# Altium PCB Glog 5G_V1.PcbDoc (part 2 of 3)
Units mil, origin at the board's own origin, x right, y up, seen from the top; angles counter-clockwise.
Board outline 2165.35 x 3838.58 mil, 4 copper layers (Top Layer, GND, PWR, Bottom Layer); 183 components, 150 nets, 767 pads, 1532 vias.
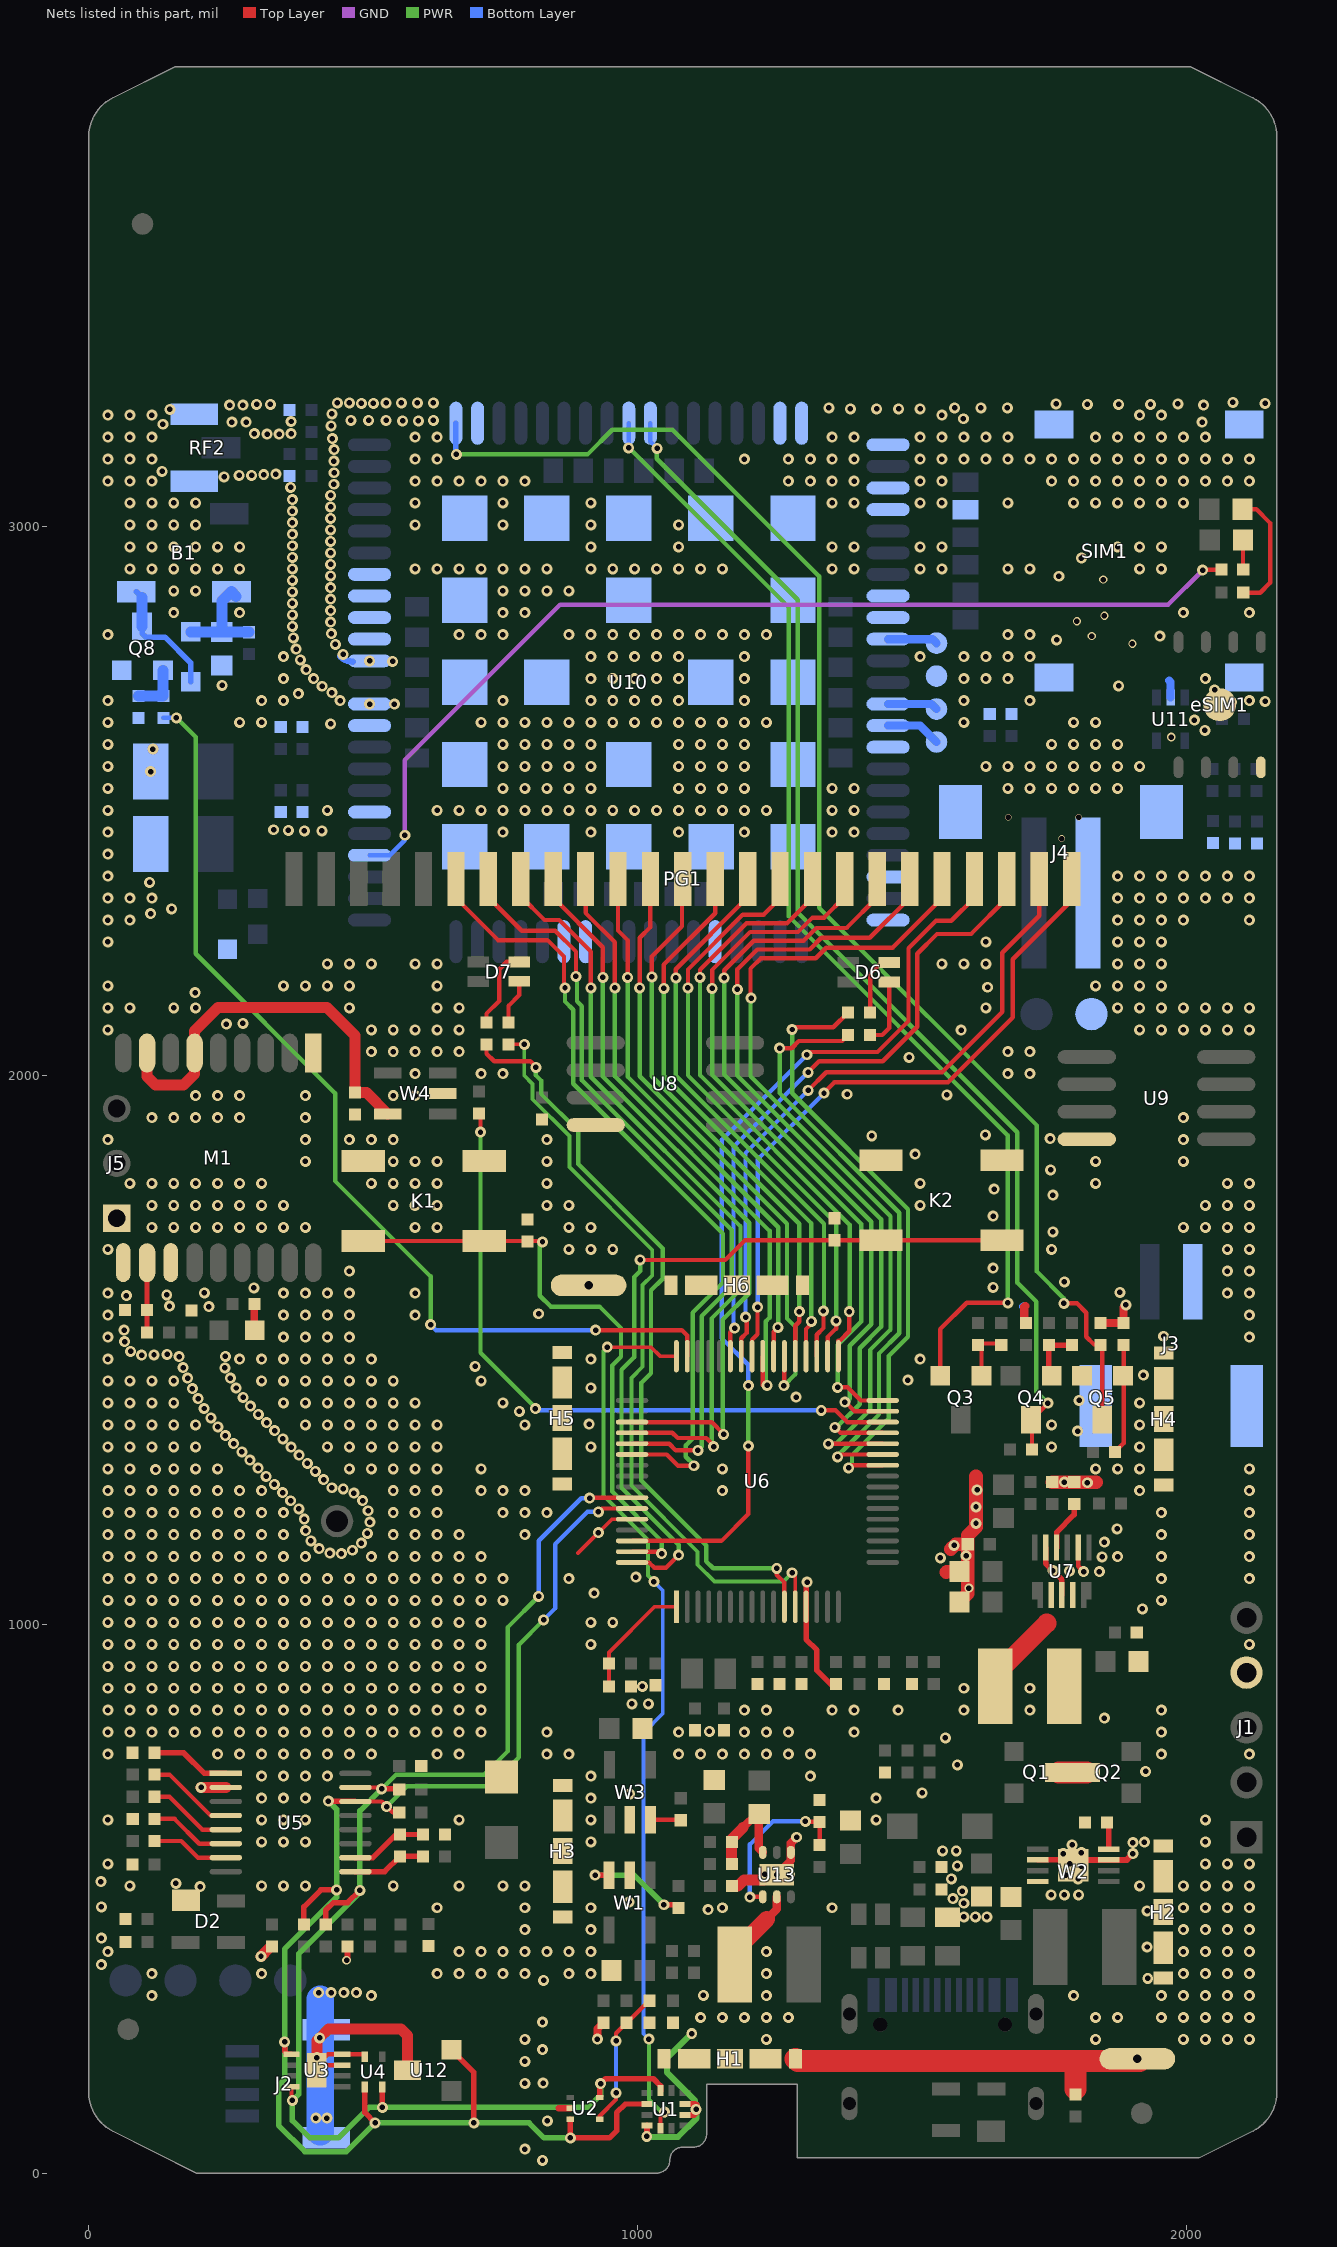
[diagram p4: the nets of this part, all layers, seen from the top]

## Via types
v1: diameter 20, hole 10, Top Layer to Bottom Layer, tented both sides, 1511 vias
v2: diameter 15, hole 10, Top Layer to Bottom Layer, tented both sides, 7 vias
v3: diameter 25, hole 16, Top Layer to Bottom Layer, tented both sides, 5 vias
v4: diameter 16, hole 10, Top Layer to Bottom Layer, tented both sides, 4 vias
v5: diameter 12, hole 10, Top Layer to Bottom Layer, tented both sides, 3 vias
v6: diameter 30, hole 20, Top Layer to Bottom Layer, tented both sides, 1 vias
v7: diameter 20, hole 16, Top Layer to Bottom Layer, tented both sides, 1 vias

## Nets (pads, with @x,y where several pads share a name; then routed paths per layer and width w, separated by ;. In a path a pad name is that pad's centre, name@x,y a point inside that pad or via, vN(x,y) a via of type N, cw(c..) or ccw(c..) an arc to the next point about the centre after c; other vN are vias at no path point) (continued)
GND: C1.2 C2.2 C3.2 C4.2 C5.1 C6.2 C7.2 C8.1 C9.1 C10.1 C11.1 C12.1 C13.2 C14.2 C15.2 C16.2 C17.2 C18.1 C19.2 C20.2 C21.1 C22.2 C23.1 C24.1 C27.1 C28.2 C29.2 C30.2 C31.1 C32.1 C34.2 C36.1 C37.2 C38.2 C39.1 C40.1 C41.2 C42.2 C43.1 C44.1 C45.2 C46.1 C47.2 C48.2 C49.2 C50.1 C51.2 C52.1 C53.1 C54.1 C55.2 C56.2 C57.2 C60.2 C61.2 D2.1 D10.2 eSIM1.0 eSIM1.C5 H1.1 H2.1 H3.1 H4.1 H5.1 H6.1 J1.4 J2.5 J2.6 J3.1 J4.1 J5.1 K1.2 K2.2 L2.2 M1.1 M1.10 M1.12 N1.1 pad.10@1545,2728 pad.10@1827.35,2112.06 Q5.E Q8.E R8.1 R9.1 R14.2 R17.1 R20.1 R21.1 R26.1 R30.1 R37.2 R54.2 R59.1 R61.2 R65.2 RF2.2 SIM1.0 SIM1.C5 U1.4 U1.8 U1.9 U2.2 U3.0 U3.7 U3.8 U4.4 U5.2 U6.13 U6.60 U7.2 U7.5 U7.9 U8.4 U9.4 U10.2 U10.17 U10.18 U10.29 U10.39 U10.45 U10.46 U10.54 U10.58 U10.59 U10.61 U10.62 U10.63 U10.64 U10.65 U10.69 U10.70 U10.71 U10.72 U10.73 U10.74 U10.75 U10.76 U10.77 U10.78 U10.79 U10.80 U10.81 U10.82 U10.83 U10.84 U10.85 U10.86 U10.87 U10.88 U10.89 U10.91 U10.92 U10.94 U11.2 U12.C U13.1 W1.2 W2.0 W2.3 W2.6 W2.8 W3.2 W4.2 | length 3240.1
  Top Layer w7: 892,1130 953.45,1191.45 U6.60@990.29,1191.45
  Top Layer w8: U3.0@415.82,187.01 425.67,196.85 U3.7@462.08,196.85 ; U3.0@423.02,203.54 436.02,216.54 U3.8@462.08,216.54 498.83,216.54 U4.4@503.25,212.12 ; U7.2@1803.15,1139.78 1803.15,1105.85 v1(1813,1096)
  Top Layer w10: v1@1307.22,1077 U6.13@1307.22,1032 1307.22,972.78 1327,953 1327,916 1353,890 C19.2@1363,890 ; W2.6@1729.2,570.75 W2.0@1794.35,570.75 ; U7.5@1744.09,1139.78 1744.09,1110.91 1773.62,1081.38 U7.9@1773.62,1053.17
  Top Layer w11: v4@472,388 R61.2@472,413 ; 855.89,118.11 U2.2@877.95,118.11 ; U1.4@1017.55,86.47 1017.55,66.45 v1@1018,66 ; U1.8@1086.45,106.16 1103.16,106.16 1107.16,110.16 v1@1107.16,124.84 ; U1.9@1086.45,125.84 1105.16,125.84 ; W2.0@1794.35,570.75 W2.3@1859.12,570.75 1891.75,570.75 v1@1904,583
  Top Layer w15: v1(927,244) 927,263 C3.2@938,274 ; v1(1254,544) 1279.59,569.59 U13.1@1279.59,584.49 1279.59,601.59 v1(1290,612) ; 1707,1580 1706,1579 1705,1579 1705,1552 C34.2@1708,1549 ; C36.1@1844,1549 R37.2@1886,1549 1886,1578 v1(1890,1582)
  Top Layer w20: v1@204.27,702.73 U5.2@249.87,702.73 ; v1(314,395) C5.1@330,411 ; U3.0@415.82,187.01 415.82,241.38 v1(421,246.56) 437,262.56 569,262.56 581,250.56 U12.C@581,187.56 ; R65.2@1172,523 1183,523 1194,534 U13.1@1231,534
  Top Layer w25: 1563,1095 1564,1096 C29.2@1586.68,1096 ; v1@1571,1137 1580,1146 C31.1@1602,1146 ; C28.2@1586.68,1041 1602,1056.32 C31.1@1602,1146 ; 1617,1270 1617,1177 1602,1162 C31.1@1602,1146 ; R30.1@1756,1259 C32.1@1796,1259 1836,1259
  Top Layer w40: H1.1@1288.44,208.28 1292.38,204.34 1798,204.34 ; C1.2@1798,153 1798,204.34 ; N1.1@1914.94,204.34 1798,204.34
  PWR w11: v1@1018,66 1074,66 1107.16,99.16 v1@1107.16,124.84 ; v1@1098,254 1054,210 1054,183 1105.16,131.84 v1@1105.16,124.84
  Bottom Layer w12: v1@458.1,2764.14 ccw(c482,2789) U10.61@481.16,2754.53
  Bottom Layer w15: 1703,1579 1705,1579 ; 1969,2720 1971.59,2717.41 U11.2@1971.59,2689
  Bottom Layer w50: J2.6@422,75.52 J2.5@422,260 ; J2.5@422,261.37 422,317
  other v1: 827,23 795,43.5 1017,67 836,95 414,100 434,100 1107.16,116 795,163.5 828,164 795,203.5 416,210.56 827,225 795,243.5 1235,243.5 1835,243.5 1995,243.5 2035,243.5 2075,243.5 2115,243.5 1099,254 827,275 1115,283.5 1155,283.5 1195,283.5 1235,283.5 1275,283.5 1835,283.5 1875,283.5 1955,283.5 1995,283.5 2035,283.5 2075,283.5 2115,283.5 115,323.5 515,323.5 1120,324 1235,323.5 1795,323.5 1955,323.5 1995,323.5 2035,323.5 2075,323.5 2115,323.5 419,329 442,329 465,329 488,329 829,351 1930,355 115,363.5 315,363.5 635,363.5 675,363.5 715,363.5 755,363.5 795,363.5 875,363.5 915,363.5 1235,363.5 1995,363.5 2035,363.5 2075,363.5 2115,363.5 23,380 35,403.5 675,403.5 715,403.5 755,403.5 795,403.5 835,403.5 875,403.5 915,403.5 1235,403.5 1995,403.5 2035,403.5 2075,403.5 2115,403.5 1929,412 23,428 795,443.5 915,443.5 1995,443.5 2035,443.5 2075,443.5 2115,443.5 1595,467 1616,467 1637,467 1929,478 1129,480 635,483.5 795,483.5 915,483.5 1155,483.5 1355,483.5 1995,483.5 2035,483.5 2075,483.5 2115,483.5 23,485 1594.71,491.72 985,494 1575,500 1754,507 1778,507 1804,507 1592,514 203,522 75,523.5 315,523.5 355,523.5 395,523.5 555,523.5 675,523.5 755,523.5 795,523.5 1915,523.5 1995,523.5 2035,523.5 2075,523.5 2115,523.5 159,528 22,531 1572,536 1803,536 1781,543 1277,544 1232,545 1809,559 1583,560 35,563.5 1788,564 2035,563.5 2075,563.5 2115,563.5 1776,582 1903,582 1809,584 1556,587 1581,587 1792,598 1903,602 1924,603 315,603.5 355,603.5 395,603.5 915,603.5 2035,603.5 35,643.5 315,643.5 355,643.5 395,643.5 675,643.5 915,643.5 1435,643.5 2035,643.5 315,683.5 355,683.5 395,683.5 915,683.5 1435,683.5 986,691 1519,693 205,703 315,723.5 355,723.5 395,723.5 435,723.5 915,723.5 1315,723.5 1926,732 1583,744 35,763.5 235,763.5 275,763.5 315,763.5 355,763.5 395,763.5 435,763.5 475,763.5 515,763.5 635,763.5 675,763.5 835,763.5 875,763.5 1075,763.5 1115,763.5 1155,763.5 1195,763.5 1235,763.5 1275,763.5 1315,763.5 1955,763.5 2115,763.5 1561,793 35,803.5 75,803.5 115,803.5 155,803.5 195,803.5 235,803.5 275,803.5 315,803.5 355,803.5 395,803.5 435,803.5 475,803.5 515,803.5 555,803.5 595,803.5 635,803.5 675,803.5 715,803.5 835,803.5 1075,803.5 1195,803.5 1235,803.5 1275,803.5 1395,803.5 1955,803.5 1131,805 1851,829 35,843.5 75,843.5 115,843.5 155,843.5 195,843.5 235,843.5 275,843.5 315,843.5 355,843.5 395,843.5 435,843.5 475,843.5 515,843.5 555,843.5 595,843.5 635,843.5 675,843.5 715,843.5 1195,843.5 1235,843.5 1355,843.5 1395,843.5 1475,843.5 1595,843.5 1715,843.5 1955,843.5 990,855 1020,855 35,883.5 75,883.5 115,883.5 155,883.5 195,883.5 235,883.5 275,883.5 315,883.5 355,883.5 395,883.5 435,883.5 475,883.5 515,883.5 555,883.5 595,883.5 635,883.5 675,883.5 715,883.5 1595,883.5 1715,883.5 1009,887 35,923.5 75,923.5 115,923.5 155,923.5 195,923.5 235,923.5 275,923.5 315,923.5 355,923.5 395,923.5 435,923.5 475,923.5 515,923.5 555,923.5 595,923.5 635,923.5 675,923.5 715,923.5 35,963.5 75,963.5 115,963.5 155,963.5 195,963.5 235,963.5 275,963.5 315,963.5 355,963.5 395,963.5 435,963.5 475,963.5 515,963.5 555,963.5 595,963.5 635,963.5 675,963.5 715,963.5 915,963.5 2115,963.5 35,1003.5 75,1003.5 115,1003.5 155,1003.5 195,1003.5 235,1003.5 275,1003.5 315,1003.5 355,1003.5 395,1003.5 435,1003.5 475,1003.5 515,1003.5 555,1003.5 595,1003.5 635,1003.5 675,1003.5 715,1003.5 915,1003.5 955,1003.5 1920,1028 35,1043.5 75,1043.5 115,1043.5 155,1043.5 195,1043.5 235,1043.5 275,1043.5 315,1043.5 355,1043.5 395,1043.5 435,1043.5 475,1043.5 515,1043.5 555,1043.5 595,1043.5 635,1043.5 675,1043.5 715,1043.5 755,1043.5 1955,1043.5 921,1057 1309.22,1077 35,1083.5 75,1083.5 115,1083.5 155,1083.5 195,1083.5 235,1083.5 275,1083.5 315,1083.5 355,1083.5 395,1083.5 435,1083.5 475,1083.5 515,1083.5 555,1083.5 595,1083.5 635,1083.5 675,1083.5 715,1083.5 755,1083.5 875,1083.5 1955,1083.5 2115,1083.5 997,1086 1842,1096 1787,1097 1757,1098 1552,1121 1847,1123 35,1123.5 75,1123.5 115,1123.5 155,1123.5 195,1123.5 235,1123.5 275,1123.5 315,1123.5 355,1123.5 395,1123.5 515,1123.5 555,1123.5 595,1123.5 635,1123.5 675,1123.5 715,1123.5 1875,1123.5 1955,1123.5 2115,1123.5 1599,1125 460.31,1128.72 439.33,1129.67 480.35,1135 419.97,1137.81 1577,1144 496.97,1147.83 1851,1150 404.7,1152.22 35,1163.5 75,1163.5 115,1163.5 155,1163.5 195,1163.5 235,1163.5 275,1163.5 315,1163.5 355,1163.5 555,1163.5 595,1163.5 635,1163.5 675,1163.5 795,1163.5 1955,1163.5 2115,1163.5 508.06,1165.66 929,1167 395.27,1170.98 1874,1174 1617,1184 512.38,1186.22 392.81,1191.84 35,1203.5 75,1203.5 115,1203.5 155,1203.5 195,1203.5 235,1203.5 275,1203.5 315,1203.5 355,1203.5 555,1203.5 595,1203.5 635,1203.5 755,1203.5 795,1203.5 835,1203.5 1955,1203.5 2115,1203.5 509.4,1207 382.91,1210.36 1617,1214 368.06,1225.21 499.26,1225.4 483.46,1239.22 353.21,1240.06 35,1243.5 75,1243.5 115,1243.5 155,1243.5 195,1243.5 235,1243.5 275,1243.5 315,1243.5 555,1243.5 595,1243.5 635,1243.5 715,1243.5 755,1243.5 795,1243.5 1155,1243.5 1915,1243.5 2115,1243.5 1619,1245 463.88,1246.82 442.99,1248.93 338.36,1254.91 1820,1258 1778,1259 428.11,1263.75 323.51,1269.76 413.26,1278.6 122,1282 35,1283.5 75,1283.5 155,1283.5 195,1283.5 235,1283.5 475,1283.5 515,1283.5 555,1283.5 595,1283.5 635,1283.5 715,1283.5 1155,1283.5 1835,1283.5 1875,1283.5 1915,1283.5 2115,1283.5 308.67,1284.61 398.41,1293.45 293.82,1299.45 383.56,1308.3 278.97,1314.3 35,1323.5 75,1323.5 115,1323.5 155,1323.5 195,1323.5 368.72,1323.15 435,1323.5 475,1323.5 515,1323.5 555,1323.5 595,1323.5 635,1323.5 915,1323.5 1755,1323.5 1915,1323.5 264.12,1329.15 353.87,1338 249.27,1344 1802,1352 339.02,1352.85 235.24,1359.63 35,1363.5 75,1363.5 115,1363.5 155,1363.5 195,1363.5 395,1363.5 435,1363.5 475,1363.5 515,1363.5 555,1363.5 595,1363.5 635,1363.5 795,1363.5 1755,1363.5 1915,1363.5 912,1365 324.17,1367.7 222.54,1376.36 309.32,1382.55 785,1388 210.17,1393.33 294.66,1397.59 35,1403.5 75,1403.5 115,1403.5 155,1403.5 355,1403.5 395,1403.5 435,1403.5 475,1403.5 515,1403.5 555,1403.5 595,1403.5 755,1403.5 1915,1403.5 1805,1408 199.38,1411.34 281.32,1413.8 1289,1414 189.1,1429.65 268.83,1430.69 915,1431 35,1443.5 75,1443.5 115,1443.5 155,1443.5 315,1443.5 355,1443.5 395,1443.5 435,1443.5 475,1443.5 515,1443.5 555,1443.5 715,1443.5 1493,1445 180.12,1448.63 258.03,1448.7 1922,1454 248.21,1467.26 172.06,1468.03 704,1470 35,1483.5 275,1483.5 315,1483.5 355,1483.5 395,1483.5 435,1483.5 475,1483.5 515,1483.5 915,1483.5 1515,1483.5 164.99,1487.8 249.09,1488.24 96.32,1490.74 119,1491 143,1492 76.42,1497.44 65.48,1515.37 35,1523.5 355,1523.5 395,1523.5 435,1523.5 475,1523.5 2115,1523.5 1959,1525 64.74,1536.36 35,1563.5 355,1563.5 395,1563.5 435,1563.5 475,1563.5 595,1563.5 2115,1563.5 820,1566 219,1579 147.26,1579.97 68.72,1598.96 142.26,1600.36 35,1603.5 211,1604 355,1603.5 395,1603.5 435,1603.5 475,1603.5 595,1603.5 2075,1603.5 2115,1603.5 1879,1605 301,1613 1648,1614 1778,1624 475,1643.5 2075,1643.5 2115,1643.5 1648,1649 35,1683.5 875,1683.5 915,1683.5 955,1683.5 1755,1683.5 2075,1683.5 2115,1683.5 1757,1715 115,1723.5 155,1723.5 195,1723.5 235,1723.5 275,1723.5 315,1723.5 355,1723.5 395,1723.5 595,1723.5 635,1723.5 875,1723.5 915,1723.5 1995,1723.5 2035,1723.5 2075,1723.5 2115,1723.5 1648,1744 115,1763.5 155,1763.5 195,1763.5 235,1763.5 275,1763.5 315,1763.5 355,1763.5 555,1763.5 595,1763.5 635,1763.5 835,1763.5 875,1763.5 1515,1763.5 2035,1763.5 2075,1763.5 2115,1763.5 1757,1782 1650,1793 75,1803.5 115,1803.5 155,1803.5 195,1803.5 235,1803.5 275,1803.5 315,1803.5 515,1803.5 555,1803.5 595,1803.5 635,1803.5 835,1803.5 1515,1803.5 1835,1803.5 2075,1803.5 2115,1803.5 1753,1828 395,1843.5 555,1843.5 595,1843.5 635,1843.5 835,1843.5 1835,1843.5 1995,1843.5 1506,1857 35,1883.5 395,1883.5 475,1883.5 515,1883.5 555,1883.5 835,1883.5 1995,1883.5 1752,1885 1427,1890 1634,1892 115,1923.5 155,1923.5 195,1923.5 235,1923.5 275,1923.5 395,1923.5 1995,1923.5 195,1963.5 235,1963.5 275,1963.5 395,1963.5 555,1963.5 595,1963.5 1564,1965 1382,1966 595,2003.5 715,2003.5 755,2003.5 1675,2003.5 1715,2003.5 1495,2033 515,2043.5 555,2043.5 595,2043.5 635,2043.5 675,2043.5 1675,2043.5 1715,2043.5 1590,2083 35,2083.5 515,2083.5 555,2083.5 595,2083.5 635,2083.5 675,2083.5 1915,2083.5 1955,2083.5 1995,2083.5 2035,2083.5 2075,2083.5 2115,2083.5 251,2094 281,2095 35,2123.5 75,2123.5 155,2123.5 195,2123.5 475,2123.5 635,2123.5 675,2123.5 1635,2123.5 1875,2123.5 1915,2123.5 1955,2123.5 1995,2123.5 2035,2123.5 2075,2123.5 2115,2123.5 194,2151 1638,2161 35,2163.5 355,2163.5 395,2163.5 435,2163.5 475,2163.5 635,2163.5 1835,2163.5 1875,2163.5 1915,2163.5 1955,2163.5 435,2203.5 475,2203.5 515,2203.5 595,2203.5 635,2203.5 1555,2203.5 1595,2203.5 1635,2203.5 1875,2203.5 1915,2203.5 1955,2203.5 35,2243.5 1635,2243.5 1875,2243.5 1915,2243.5 1955,2243.5 35,2283.5 75,2283.5 1875,2283.5 1915,2283.5 1955,2283.5 1995,2283.5 2115,2283.5 113,2295 151,2304 35,2323.5 75,2323.5 115,2323.5 1875,2323.5 1915,2323.5 1955,2323.5 1995,2323.5 2035,2323.5 2075,2323.5 2115,2323.5 111,2352 35,2363.5 1875,2363.5 1915,2363.5 1955,2363.5 1995,2363.5 2035,2363.5 2075,2363.5 2115,2363.5 35,2403.5 35,2443.5 755,2443.5 915,2443.5 1075,2443.5 1195,2443.5 1355,2443.5 1395,2443.5 393,2446 425,2446 364,2447 337,2448 35,2483.5 435,2483.5 635,2483.5 675,2483.5 715,2483.5 755,2483.5 795,2483.5 835,2483.5 875,2483.5 915,2483.5 955,2483.5 995,2483.5 1035,2483.5 1075,2483.5 1115,2483.5 1155,2483.5 1195,2483.5 1235,2483.5 1355,2483.5 1395,2483.5 35,2523.5 755,2523.5 795,2523.5 835,2523.5 875,2523.5 915,2523.5 1075,2523.5 1115,2523.5 1155,2523.5 1195,2523.5 1355,2523.5 1395,2523.5 1675,2523.5 1715,2523.5 1755,2523.5 1795,2523.5 1835,2523.5 1875,2523.5 113,2554 35,2563.5 755,2563.5 795,2563.5 835,2563.5 875,2563.5 915,2563.5 1075,2563.5 1115,2563.5 1155,2563.5 1195,2563.5 1635,2563.5 1675,2563.5 1715,2563.5 1755,2563.5 1795,2563.5 1835,2563.5 1875,2563.5 1915,2563.5 117,2595 35,2603.5 755,2603.5 795,2603.5 835,2603.5 875,2603.5 915,2603.5 1075,2603.5 1115,2603.5 1155,2603.5 1195,2603.5 1755,2603.5 1795,2603.5 1835,2603.5 1875,2603.5 2034,2629 441,2641 35,2643.5 275,2643.5 315,2643.5 715,2643.5 755,2643.5 795,2643.5 835,2643.5 875,2643.5 915,2643.5 955,2643.5 995,2643.5 1035,2643.5 1075,2643.5 1115,2643.5 1155,2643.5 1195,2643.5 1235,2643.5 1595,2643.5 1795,2643.5 1835,2643.5 2015,2648 557,2677 511.81,2677.17 2083,2681 2144,2682 35,2683.5 315,2683.5 355,2683.5 458.18,2683.52 755,2683.5 915,2683.5 955,2683.5 995,2683.5 1035,2683.5 1075,2683.5 1195,2683.5 1595,2683.5 1715,2683.5 2115,2683.5 382,2696 443.09,2698.12 2052,2703 425.45,2709.52 1877,2710 243,2711 355,2723.5 409.76,2723.47 915,2723.5 955,2723.5 995,2723.5 1035,2723.5 1075,2723.5 1195,2723.5 1595,2723.5 1635,2723.5 1675,2723.5 2035,2723.5 396.39,2739.67 554,2755 511.81,2755.91 385.68,2757.73 355,2763.5 915,2763.5 955,2763.5 995,2763.5 1035,2763.5 1075,2763.5 1195,2763.5 1515,2763.5 1595,2763.5 1635,2763.5 1675,2763.5 1715,2763.5 463.45,2767.49 377.83,2777.21 449.6,2785.9 1764,2794 373.03,2797.65 1952,2801 35,2803.5 675,2803.5 715,2803.5 755,2803.5 875,2803.5 915,2803.5 955,2803.5 995,2803.5 1035,2803.5 1075,2803.5 1115,2803.5 1155,2803.5 1195,2803.5 1235,2803.5 1675,2803.5 1715,2803.5 442.05,2805.49 371.2,2818.57 440.86,2826.46 371.14,2839.57 155,2843.5 275,2843.5 755,2843.5 795,2843.5 1995,2843.5 2115,2843.5 440.86,2847.46 371.14,2860.57 440.86,2868.46 371.14,2881.57 155,2883.5 195,2883.5 755,2883.5 795,2883.5 835,2883.5 875,2883.5 440.86,2889.46 371.14,2902.57 1768,2910 440.86,2910.46 75,2923.5 115,2923.5 155,2923.5 195,2923.5 235,2923.5 275,2923.5 371.14,2923.57 595,2923.5 635,2923.5 675,2923.5 715,2923.5 755,2923.5 795,2923.5 835,2923.5 915,2923.5 955,2923.5 995,2923.5 1035,2923.5 1075,2923.5 1115,2923.5 1155,2923.5 1355,2923.5 1395,2923.5 1515,2923.5 1555,2923.5 1675,2923.5 1715,2923.5 1915,2923.5 1955,2923.5 440.86,2931.46 1809,2943 371.14,2944.57 440.86,2952.46 75,2963.5 115,2963.5 155,2963.5 195,2963.5 235,2963.5 275,2963.5 915,2963.5 1075,2963.5 1355,2963.5 1395,2963.5 1515,2963.5 1555,2963.5 1875,2963.5 1915,2963.5 1955,2963.5 371.14,2965.57 440.86,2973.46 371.14,2986.57 440.86,2994.46 75,3003.5 115,3003.5 155,3003.5 195,3003.5 595,3003.5 755,3003.5 915,3003.5 1075,3003.5 371.14,3007.57 440.86,3015.46 371.14,3028.57 440.86,3036.46 75,3043.5 115,3043.5 155,3043.5 195,3043.5 595,3043.5 755,3043.5 915,3043.5 1355,3043.5 1395,3043.5 1515,3043.5 1555,3043.5 1675,3043.5 1795,3043.5 1835,3043.5 1875,3043.5 1915,3043.5 1955,3043.5 1995,3043.5 371.14,3049.57 440.86,3057.46 368,3072 446.68,3077.63 35,3083.5 75,3083.5 115,3083.5 595,3083.5 635,3083.5 675,3083.5 715,3083.5 755,3083.5 795,3083.5 1275,3083.5 1315,3083.5 1355,3083.5 1395,3083.5 1515,3083.5 1555,3083.5 1755,3083.5 1795,3083.5 1835,3083.5 1875,3083.5 1915,3083.5 1955,3083.5 1995,3083.5 2035,3083.5 2075,3083.5 2115,3083.5 247,3091 274,3094 297,3094 319,3095 341,3096 447.26,3098.63 134,3101 446.95,3119.62 35,3123.5 75,3123.5 115,3123.5 595,3123.5 635,3123.5 1195,3123.5 1275,3123.5 1315,3123.5 1355,3123.5 1395,3123.5 1515,3123.5 1555,3123.5 1595,3123.5 1635,3123.5 1675,3123.5 1715,3123.5 1755,3123.5 1795,3123.5 1835,3123.5 1875,3123.5 1915,3123.5 1955,3123.5 1995,3123.5 2035,3123.5 2075,3123.5 2115,3123.5 447.26,3140.62 444,3161 35,3163.5 75,3163.5 115,3163.5 595,3163.5 635,3163.5 1355,3163.5 1395,3163.5 1515,3163.5 1555,3163.5 1595,3163.5 1635,3163.5 1675,3163.5 1835,3163.5 1875,3163.5 1915,3163.5 1955,3163.5 1995,3163.5 2035,3163.5 325,3169 347,3169 302,3170 369,3170 442,3184 135,3187 261,3191 287,3191 2029,3191 369,3192 572,3193 601,3193 478,3194 510,3194 542,3194 628,3194 1594,3197 35,3203.5 75,3203.5 115,3203.5 1555,3203.5 1915,3203.5 1955,3203.5 443,3206 148,3214 1388,3215 1436,3215 1476,3215 1515,3215 1349,3217 1578,3217 1626,3217 1674,3217 257,3222 281,3222 2032,3222 306,3223 331,3223 1820,3223 1877,3223 1935,3223 1763,3224 1985,3224 497,3225 519,3225 2144,3225 453,3226 475,3226 542,3226 570,3226 599,3226 628,3226 2085,3227
  other v2: 1902,2787 1828,2801 1801,2828 1851,2838 1849,2904
  other v4: 470,388 1604,1066 1973,2617
  other v5: 1773,2432 1676,2471 1804,2471
GPS_3V3: C42.1 M1.6 M1.8 W4.5 | length 733
  Top Layer w20: M1.8@106.3,2041.05 106.3,1998.7 122,1983 173,1983 192.91,2002.91 M1.6@192.91,2041.05 192.91,2081 235.91,2124 434,2124 485,2073 C42.1@485,1969 506,1969 W4.5@545,1930
GPS_PWR_EN: R40.2 U6.30 | length 1230.7
  Top Layer w8: R40.2@704,1931 R40.2@711,1931 714,1928 v1(714,1897) ; v1(1335,1390) 1361,1390 1382.39,1368.61 U6.30@1446.98,1368.61
  PWR w8: v1(714,1897) 714,1495 814,1395 v1(814,1393)
  Bottom Layer w8: v1(814,1393) 817,1390 v1(1335,1390)
I2C0_SCL: R3.1 R5.1 U1.12 U2.5 U3.4 U4.2 U5.15 U6.58 | length 2568.8
  Top Layer w8: v1@369,129.56 371.28,131.84 v1(371.28,132.28) ; v1@369.56,134.56 U3.4@369.56,157.48 ; U5.15@486.09,702.73 531.27,702.73 v1(534,700) ; v1(913,1230) 913.82,1230.82 U6.58@990.29,1230.82
  Top Layer w10: R5.1@432,453 432,479 446,493 472,493 v1(494,515) ; v1(534,700) 565,700 R3.1@566,699 ; U4.2@534.75,157 534.75,119.81 v1(535,119.56) ; U2.5@931.1,137.8 931.1,161.1 v1(933,163) 941.87,171.87 1029.13,171.87 1042.16,158.84 U1.12@1042.16,150.45
  PWR w8: v1(534,700) 560,726 721,726 764,769 764,995 v1(820,1051)
  PWR w10: v1(534,700) 494,660 v1(494,515) 494,511 383,400 383,144 v1(371.28,132.28) 371.28,95.72 403,64 455,64 510.56,119.56 v1(535,119.56) 910.56,119.56 933,142 v1(933,163)
  Bottom Layer w8: v1(820,1051) 820,1152.17 897.83,1230 v1(913,1230)
I2C0_SDA: R4.1 R6.1 U1.2 U2.3 U3.1 U4.1 U5.14 U6.59 U12.E | length 2803.5
  Top Layer w8: U5.14@485.22,678 U5.14@486.09,677.13 533.87,677.13 v1(543,668) 554,657 R4.1@566,657 ; v1(929,1205) 935.13,1211.13 U6.59@990.29,1211.13
  Top Layer w10: v1(357,239) 357,222 362.46,216.54 U3.1@369.56,216.54 ; R6.1@392,453 392,485 423,516 v1(452,516) ; v1(437,678) U5.14@485.22,678 ; U4.1@503.25,157 503.25,110.31 v1(522,91.56) ; U12.E@661,224.56 702,183.56 v1(702,91.56) ; U2.3@877.95,98.43 v1(877.95,64.05) 949.05,64.05 962,77 962,110 977.87,125.87 U1.2@1017.52,125.87
  PWR w8: v1(543,668) 580,705 731,705 784,758 784,963 v1(829,1008)
  PWR w10: v1(437,678) 452,663 v1(452,516) 452,503 357,408 357,171 346,160 346,87 394,39 469.44,39 v1(522,91.56) v1(702,91.56) 802.44,91.56 829.95,64.05 v1(877.95,64.05)
  Bottom Layer w8: v1(829,1008) 850,1029 850,1146 909,1205 v1(929,1205)
KEY_START: C39.2 K1.1 U6.63 | length 1110
  Top Layer w8: K1.1@500.24,1698.65 K1.1@720.67,1698.65 825.35,1698.65 v1(827,1697) ; U6.63@990.29,1132.39 1040.61,1132.39 v1(1044,1129)
  PWR w8: v1(827,1697) 822,1692 822,1599 842,1579 931,1579 970,1540 970,1487.76 954,1471.76 954,1242 1044,1152 v1(1044,1129)
KEY_STOP: C40.2 K2.1 U6.64 | length 1367.8
  Top Layer w8: U6.64@990.29,1112.71 1021.29,1112.71 1031,1103 1052,1103 v1(1075,1126) ; v1(1005,1664) 1160,1664 1196,1700 C40.2@1359,1700 K2.1@1444,1700 K2.1@1664.43,1700
  PWR w8: v1(1005,1664) 1005,1644 994,1633 994,1487 971,1464 971,1249 1075,1145 v1(1075,1126)
LCD_COM0: PG1.25 U6.41 | length 1234.7
  Top Layer w6: PG1.25@1791.34,2358.43 PG1.25@1791.34,2360.43
  Top Layer w8: U6.41@1208.8,1488.69 1208.8,1518.41 1218.87,1528.49 1218.87,1577.87 v1(1219,1578) ; v1@1339,1968 1359,1988 1566,1988 1684,2106 1684,2212 1791.34,2319.34 PG1.25@1791.34,2358.43
  Bottom Layer w8: v1(1219,1578) 1219,1847 v1(1340,1968)
LCD_COM1: PG1.24 U6.42 | length 1221.9
  Top Layer w6: PG1.24@1732.28,2358.43 PG1.24@1732.28,2360.43
  Top Layer w8: U6.42@1189.11,1488.69 1189.11,1521.18 1198.87,1530.94 1198.87,1558.13 v1(1197,1560) ; v1(1311,1973) 1344,2006 1555,2006 1665,2116 1665,2224 1732.28,2291.28 PG1.24@1732.28,2358.43
  Bottom Layer w8: v1(1197,1560) 1197,1859 v1(1311,1973)
LCD_COM2: PG1.23 U6.43 | length 1186.2
  Top Layer w6: PG1.23@1673.23,2358.43 PG1.23@1673.23,2360.43
  Top Layer w8: U6.43@1169.43,1488.69 1169.43,1532.43 v1(1177,1540) ; v1(1311,2006) 1331,2026 1447,2026 1510,2089 1510,2222 1546,2258 1608,2258 1673.23,2323.23 PG1.23@1673.23,2358.43
  Bottom Layer w8: v1(1177,1540) 1175.13,1541.87 1175.13,1870.13 v1(1311,2006)
LCD_COM3: PG1.22 U6.62 | length 1688.6
  Top Layer w8: U6.62@990.29,1152.08 1153.08,1152.08 1202,1201 v1(1202,1325) ; v1(1309,2038) 1314,2043 1437.45,2043 1494,2099.55 1494,2232 1544,2282 1572,2282 1614.17,2324.17 PG1.22@1614.17,2358.43
  PWR w8: v1(1202,1325) v1(1202,1435)
  Bottom Layer w8: v1(1202,1435) 1202,1473 1154,1521 1154,1883 v1(1309,2038)
LCD_SEG5: PG1.21 U6.28 | length 1564.3
  Top Layer w8: v1(1207,2141) 1206,2142 1206,2195 1225,2214 1325,2214 1344,2233 1465,2233 1555.12,2323.12 PG1.21@1555.12,2358.43 ; v1(1348,1329) 1348.24,1329.24 U6.28@1446.98,1329.24
  PWR w8: v1(1207,2141) 1206,2140 1206,1998.74 1461.25,1743.49 1461.25,1537.15 1424,1499.9 1424,1391 1362,1329 v1(1348,1329)
LCD_SEG6: PG1.20 U6.29 | length 1473.3
  Top Layer w8: v1(1182,2157) 1182,2193.45 1218.42,2229.87 1313.87,2229.87 1335,2251 1423.24,2251 1496.06,2323.82 PG1.20@1496.06,2358.43 ; v1(1360,1359) 1370.07,1348.93 U6.29@1446.98,1348.93
  PWR w8: v1(1182,2157) 1182,2000.29 1444,1738.29 1444,1542.35 1405,1503.35 1405,1401.07 1362.93,1359 v1(1360,1359)
LCD_SEG10: PG1.19 U6.31 | length 1365.1
  Top Layer w6: PG1.19@1437.01,2358.43 PG1.19@1437.01,2360.43
  Top Layer w8: v1(1158,2178) 1158,2191.9 1211.85,2245.75 1302.75,2245.75 1326,2269 1381.2,2269 1437.01,2324.8 PG1.19@1437.01,2358.43 ; v1(1378,1405) 1379,1405 1395.7,1388.3 U6.31@1446.98,1388.3
  PWR w8: v1(1158,2178) 1158,2001.84 1426,1733.84 1426,1546.8 1386.87,1507.67 1386.87,1410.87 1381,1405 v1(1378,1405)
LCD_SEG11: PG1.18 U6.32 | length 1314.5
  Top Layer w6: PG1.18@1377.95,2358.43 PG1.18@1377.95,2360.43
  Top Layer w8: v1(1136,2159) 1136,2192.35 1205.27,2261.62 1292.62,2261.62 1319,2288 1340.17,2288 1377.95,2325.79 PG1.18@1377.95,2358.43 ; v1(1365,1432) 1383,1432 1407.02,1407.98 U6.32@1446.98,1407.98
  PWR w8: v1(1136,2159) 1136,2001.39 1407.87,1729.52 1407.87,1551.87 1365,1509 v1(1365,1432)
LCD_SEG12: PG1.17 U6.33 | length 1123.1
  Top Layer w6: PG1.17@1318.9,2323.9 PG1.17@1318.9,2358.43 PG1.17@1318.9,2360.43
  Top Layer w8: v1(1114,2179) 1114,2192.8 1198.7,2277.5 1272.5,2277.5 PG1.17@1318.9,2323.9 ; U6.33@1366.28,1488.69 1366.28,1517 1369,1517 1386,1534 v1(1386,1570)
  PWR w8: v1(1114,2179) 1114,2000.94 1387,1727.94 1387,1571 v1(1386,1570)
LCD_SEG13: PG1.16 U6.34 | length 1081.8
  Top Layer w6: PG1.16@1259.84,2358.43 PG1.16@1259.84,2360.43
  Top Layer w8: v1(1092.13,2160) 1092.13,2193.37 1192.12,2293.37 1230.37,2293.37 1259.84,2322.84 PG1.16@1259.84,2358.43 ; U6.34@1346.59,1488.69 1346.59,1523.59 1362,1539 v1(1362,1553)
  PWR w8: v1(1092.13,2160) 1092.13,2000.37 1362,1730.49 v1(1362,1553)
LCD_SEG14: PG1.15 U6.35 | length 1043.5
  Top Layer w6: PG1.15@1200.79,2358.43 PG1.15@1200.79,2360.43
  Top Layer w8: v1(1070,2178) 1070,2194 1200.79,2324.79 PG1.15@1200.79,2358.43 ; U6.35@1326.91,1488.69 1326.91,1527.91 1339,1540 v1(1339,1571)
  PWR w8: v1@1070.25,2177.75 v1(1070,2178) 1070,2000.04 1340,1730.04 1340,1572 v1(1339,1571)
LCD_SEG15: PG1.14 U6.36 | length 1026
  Top Layer w6: PG1.14@1141.73,2358.43 PG1.14@1141.73,2360.43
  Top Layer w8: v1(1048,2159) 1048,2202.27 1141.73,2296 PG1.14@1141.73,2358.43 ; U6.36@1307.22,1488.69 1307.22,1538.22 1317,1548 v1(1317,1552)
  PWR w8: v1(1048,2159) 1048,1999.59 1317,1730.59 v1(1317,1552)
LCD_SEG24: PG1.13 U6.37 | length 1022.1
  Top Layer w6: PG1.13@1082.68,2360.43 PG1.13@1090.71,2352.4
  Top Layer w8: v1@1027.68,2181.43 v1(1026.13,2179.87) 1026.13,2217.13 1081.13,2272.13 PG1.13@1081.13,2359.98 ; U6.37@1287.54,1488.69 1287.54,1544 1295,1551.46 v1(1295,1570)
  PWR w8: v1(1026.13,2179.87) 1026.13,1999.02 1141.07,1884.07 1295,1730.14 v1(1295,1570)
LCD_SEG25: PG1.12 U6.38 | length 1113.9
  Top Layer w6: PG1.12@1023.62,2358.43 PG1.12@1023.62,2360.43
  Top Layer w8: v1(1004,2160) 1004,2251 1023.62,2270.62 PG1.12@1023.62,2358.43 ; v1(1267,1435) 1267.85,1435.85 U6.38@1267.85,1488.69
  PWR w8: v1(1004,2160) 1004,1998.7 1272.62,1730.07 1272.62,1557.38 1288,1542 1288,1456 v1(1267,1435)
LCD_SEG26: PG1.11 U6.39 | length 994.3
  Top Layer w8: PG1.11@964.57,2358.43 964.57,2264.43 982,2247 v1(982,2179) ; U6.39@1248.17,1488.69 1248.17,1533.17 v1(1256,1541)
  PWR w8: v1(982,2179) 982,1998.25 1256.75,1723.5 1256.75,1541.75 v1(1256,1541)
LCD_SEG27: PG1.10 U6.40 | length 1128.8
  Top Layer w6: PG1.10@905.51,2358.43 PG1.10@905.51,2360.43
  Top Layer w8: PG1.10@905.51,2358.43 905.51,2296.49 959,2243 v1(959,2160) ; U6.40@1228.48,1488.69 1228.48,1435.52 v1(1236.52,1435.52)
  PWR w8: v1(959,2160) 959,1998.8 1240.87,1716.92 1240.87,1558.94 1234.13,1552.19 1234.13,1437.91 v1(1236.52,1435.52)
LCD_SEG28: PG1.9 U6.51 | length 1357.9
  Top Layer w8: PG1.9@846.46,2358.43 846.46,2324.54 937,2234 v1(937,2179) ; U6.51@990.29,1368.61 1135.39,1368.61 1157,1347 v1(1157,1346)
  PWR w8: v1(937,2179) 937,1998.35 1203.62,1731.73 1203.62,1603.43 1155.13,1554.93 1155.13,1347.87 v1(1157,1346)
LCD_SEG29: PG1.8 U6.52 | length 1399.9
  Top Layer w8: PG1.8@787.4,2358.43 787.4,2326.77 830.59,2283.59 857.41,2283.59 915,2226 v1(915,2160) ; U6.52@990.29,1348.93 990.72,1349.36 1063.64,1349.36 1073.5,1339.5 1125.5,1339.5 1139,1326 v1(1139,1324)
  PWR w8: v1(915,2160) 915,1997.9 1187.75,1725.15 1187.75,1610 1135.13,1557.38 1135.13,1327.87 v1(1139,1324)
LCD_SEG30: PG1.7 U6.53 | length 1411.2
  Top Layer w8: PG1.7@728.35,2358.43 728.35,2324.8 789.15,2264 850,2264 888,2226 v1(888,2181) ; U6.53@990.29,1329.24 1057.76,1329.24 1070,1317 v1(1110,1317)
  PWR w8: v1(888,2181) 889.87,2179.13 889.87,2135.58 898.87,2126.58 898.87,1991.58 1171.87,1718.58 1171.87,1616.58 1116.87,1561.57 1116.87,1323.87 v1(1110,1317)
LCD_SEG31: PG1.6 U6.54 | length 1481.3
  Top Layer w6: PG1.6@669.29,2358.43 PG1.6@669.29,2360.43
  Top Layer w8: PG1.6@669.29,2358.43 669.29,2323.71 746,2247 836,2247 866.13,2216.87 866.13,2161.87 v1(868,2160) ; U6.54@990.29,1309.56 1053.44,1309.56 1074,1289 v1(1103,1289)
  PWR w8: v1(868,2160) 868,2135 883,2120 883,1985 1156,1712 1156,1623.15 1101,1568.15 1101,1338.93 1088.13,1326.06 1088.13,1305.62 1103,1290.74 v1(1103,1289)
LED_ALM: R41.2 U6.27 | length 1100.6
  Top Layer w8: v1(1259,2050) 1281,2050 1294,2063 1373,2063 R41.2@1384,2074 ; v1(1365,1305) 1369.56,1309.56 U6.27@1446.98,1309.56
  PWR w8: v1(1259,2050) 1259,1968.19 1477.13,1750.06 1477.13,1530.58 1440.13,1493.58 1440.13,1382.58 1365,1307.45 v1(1365,1305)
LED_NC1: R42.2 U6.12 | length 1395.8
  Top Layer w7: R42.2@765,2057 v1(794,2057) ; v1(1282,1094) 1287.54,1088.46 U6.12@1287.54,1032
  PWR w7: v1(794,2057) 793.63,2056.63 793.63,2000 809,1984.63 809,1957 876,1890 876,1833.22 1027,1682.22 1027,1636 1009.37,1618.37 1009.37,1469.37 989,1449 989,1253 1109.75,1132.25 1109.75,1108.57 1140.32,1078 1266,1078 v1(1282,1094)
LED_NC2: R43.2 U6.26 | length 1110
  Top Layer w8: v1(1282,2084) 1286,2088 1357,2088 R43.2@1384,2115 ; v1(1385,1285) 1389.87,1289.87 U6.26@1446.98,1289.87
  PWR w8: v1(1282,2084) 1282,1967.64 1493,1756.64 1493,1524 1458,1489 1458,1375 1391,1308 1391,1291 v1(1385,1285)
LED_STA: R44.2 U6.11 | length 1387.7
  Top Layer w8: R44.2@725,2057 725,2040 739,2026 805,2026 v1@815,2016 ; v1(1253.87,1102.13) 1253.87,1090.13 1267.85,1076.15 U6.11@1267.85,1032
  PWR w8: v1(815,2015) 815,2000.37 824.37,1990.99 824.37,1966.63 892,1899 892,1838.96 1046,1684.96 1046,1630 1024.75,1608.75 1024.75,1457.75 1007,1440 1007,1262.07 1125.13,1143.94 1125.13,1114.94 1137.94,1102.13 v1(1253.87,1102.13)
LOG_RX: U10.22
LOG_TX: U10.23
LTE_DM: pad.10@1545,2608 U10.28 | length 100.6
  Bottom Layer w15: U10.28@1456.69,2637.8 1515.2,2637.8 pad.10@1545,2608
LTE_DP: pad.10@1545,2668 U10.27 | length 92.1
  Bottom Layer w15: U10.27@1456.69,2677.17 1535.83,2677.17 pad.10@1545,2668
LTE_PWRKEY: C36.2 Q5.C U10.1 | length 2621.9
  Top Layer w8: v1(1777,1585) 1801,1585 1818,1568 1818,1524 1832,1510 1845,1510 1845,1511 1847,1509 Q5.C@1847,1373
  PWR w8: v1(670,3132) 909,3132 954,3177 1064,3177 1331,2910 1331,2306 1728,1909 1728,1643 1777,1594 v1(1777,1585)
  Bottom Layer w10: U10.1@669.29,3188.98 669.29,3132.71 v1(670,3132)
LTE_RST: U10.16
LTE_RX: Q4.C R33.2 U10.10 | length 2185.1
  Top Layer w8: R33.2@1719,1319 1719,1371 Q4.C@1717,1373 1732,1388 1733,1388 v1(1748,1403)
  PWR w8: v1@1034,3143 1035,3142 1035,3124 1292,2867 1292,2297 1692.25,1896.75 1692.25,1622.75 1727.13,1587.87 1727.13,1423.87 v1(1748,1403)
  Bottom Layer w8: U10.10@1023.62,3188.98 1023.62,3155.38 v1(1036,3143)
LTE_TX: Q3.E U10.9 | length 2117.5
  Top Layer w8: Q3.E@1552,1453 1552,1538 1600,1586 v1(1675,1586)
  PWR w8: v1(984,3144) v1@985.5,3142.5 ; v1@986,3143 1276,2853 1276,2290 1675,1891 v1(1675,1586)
  Bottom Layer w8: v1(984,3144) 984.25,3144.25 U10.9@984.25,3188.98
LTE_VBUS: pad.10@1545,2788 U10.24 | length 91.3
  Bottom Layer w15: U10.24@1456.69,2795.28 1537.72,2795.28 pad.10@1545,2788
M_INT: U1.5 U6.48 | length 1648.3
  Top Layer w7: v1(945,1505) 1024.69,1505 1041,1488.69 U6.48@1071,1488.69 ; U1.5@1042.16,81.55 1042.16,104.16 v1(1049,111)
  PWR w7: v1(945,1505) 938,1498 938,1235 1019,1154 1019,1089 v1(1030,1078) ; v1(1021,244) 1021,134 v1@1049,106 ; v1(1049,111) v1@1049,106 ; v1@1050,105 v1@1049,106
  Bottom Layer w7: v1(1021,244) 1011,254 1011,802 1046,837 1046,1062 v1(1030,1078)
MCU_BEEP: R55.2 U6.47 | length 1835.2
  Top Layer w8: v1(924,1536) 1081,1536 1090.69,1526.31 U6.47@1090.69,1488.69
  PWR w8: v1(160,2652) 195,2617 195,2222 449,1968 449,1808 623,1634 v1(623,1546)
  Bottom Layer w8: R55.2@136,2652 v1(160,2652) ; v1(623,1546) 633,1536 v1(924,1536)
NET_STATUS: R46.1 U10.52 | length 1853.3
  Top Layer w8: v1(2030,2921) 2031,2922 R46.1@2064,2922
  GND w8: v1(576,2438) 576,2575 859,2858 1967,2858 v1(2030,2921)
  Bottom Layer w8: U10.52@511.81,2401.58 548.58,2401.58 576,2429 v1(576,2438)
NetB1_1: B1.1 C54.2 D11.K R56.1 | length 199.6
  Bottom Layer w20: D11.K@186,2808.55 187,2808.55 187.4,2808.15 C54.2@242.58,2808.15 242.58,2864.58 B1.1@260,2882 B1.1@268.87,2873.13 ; C54.2@242.73,2808 R56.1@292,2808
NetB1_2: B1.2 D11.A Q8.C | length 225.6
  Bottom Layer w10: B1.2@86.68,2882 B1.2@97.21,2871.47 ; Q8.C@97.21,2818.49 97.21,2805.79 104,2799 139,2799 186,2752 D11.A@186,2718
  Bottom Layer w20: Q8.C@97.21,2818.49 B1.2@97.21,2871.47
NetC18_2: C18.2 U5.1 | length 145.5
  Top Layer w10: C18.2@120,766 173,766 210.68,728.32 U5.1@249.87,728.32
NetC21_2: C21.2 R58.2 U6.1 | length 219.4
  Top Layer w7: C21.2@948,887 R58.2@948,929 948,949 1031,1032 U6.1@1071,1032
NetC32_2: C32.2 U7.4 | length 92.6
  Top Layer w10: U7.4@1763.78,1139.78 1763.78,1167.78 1796,1200 C32.2@1796,1219
NetC33_1: C33.1 Q3.B R35.1 | length 103
  Top Layer w7: Q3.B@1627,1453 1627,1503 R35.1@1621,1509 1624,1512 1660,1512 C33.1@1663,1509
NetC35_1: C35.1 Q4.B R36.1 | length 100.1
  Top Layer w10: Q4.B@1755,1453 1750,1458 C35.1@1750,1509 R36.1@1792,1509
NetC38_1: C38.1 C62.1 M1.11 | length 127.3
  Top Layer w8.5: C62.1@106.3,1532.3 M1.11@106.3,1659.16
  Top Layer w12: C62.1@106,1532 C62.1@106.3,1532.3
NetC57_1: C57.1 R2.2 U2.4 | length 254.4
  Top Layer w8: U2.4@931.1,98.43 931.1,104.1 961,134 v1(961,146) ; v1(961,241) 961,255 R2.2@980,274 981,274 1021,314 C57.1@1022,314
  Bottom Layer w8: v1(961,146) v1(961,241)
NetC58_1: C58.1 R8.2 U5.10 | length 140.4
  Top Layer w10: U5.10@486.09,574.77 517.77,574.77 560,617 C58.1@567,617 R8.2@609,617
NetC58_2: C58.2 R13.2 U5.9 | length 134.4
  Top Layer w10: U5.9@486.09,549.18 539.18,549.18 C58.2@567,577 R13.2@609,577
NetC59_1: C59.1 R63.1 R64.2 U13.3 | length 188.9
  Top Layer w15: 1192.66,629.34 1218,654.69 R63.1@1222,654.69 1220.95,653.64 1220.95,591.95 U13.3@1228.41,584.49
  Top Layer w20: R64.2@1171,563 1171,607.69 1192.66,629.34
NetC60_1: C60.1 R66.1 U13.4 | length 306.4
  Top Layer w8: v1(1205,503) 1205.51,503.51 U13.4@1228.41,503.51 ; v1(1306,641) 1307,640 C60.1@1332,640 R66.1@1332,598
  Bottom Layer w8: v1(1205,503) 1205,599 1247,641 v1(1306,641)
NetD6_3: D6.3 R41.1 | length 124.1
  Top Layer w8: R41.1@1424,2074 1446,2074 1458.8,2086.8 D6.3@1458.8,2170.77
NetD6_4: D6.4 R43.1 | length 125.7
  Top Layer w6: D6.4@1458.8,2206.15 D6.4@1469.85,2206.15
  Top Layer w8: R43.1@1424,2115 1424,2185 1445.15,2206.15 D6.4@1458.8,2206.15 ; R43.1@1427.24,2115.76 R43.1@1428,2115
NetD7_3: D7.3 R42.1 | length 83
  Top Layer w8: R42.1@765,2097 765,2127 784.8,2146.8 D7.3@784.8,2171.77
NetD7_4: D7.4 R44.1 | length 148.8
  Top Layer w8: R44.1@725,2097 725,2113 748,2136 748,2194 761.15,2207.15 D7.4@784.8,2207.15
NetD8_2: D8.2 R46.2 | length 54.2
  Top Layer w8: D8.2@2103.63,2976 2103.63,2922.37 R46.2@2104,2922
NetD9_2: D9.2 R45.2 | length 226.2
  Top Layer w8: D9.2@2102.63,3032 2128,3032 2152.98,3007.02 2152.98,2897.98 2135,2880 R45.2@2104,2880
NetL5_2: L5.2 U13.5 | length 164.4
  Top Layer w15: 1236,463 1254,481 U13.5@1254,503.51
  Top Layer w30: L5.2@1177.02,380 L5.2@1177.02,404.02 ; L5.2@1177.02,413.02 L5.2@1177.02,404.02 ; 1236,463 L5.2@1177.02,404.02
NetL6_1: L6.1 U7.10 | length 2.8
  Top Layer w35: L6.1@1779,895 L6.1@1781,897
NetL6_2: L6.2 U7.8 | length 145.5
  Top Layer w35: L6.2@1653.02,895 1653.02,909.02 1746,1002
NetL7_1: L7.1 R39.2 | length 48.2
  Top Layer w13.7: R39.2@302,1584 302,1536.5 L7.1@302.5,1536
NetQ1_3: Q1.3 Q2.3 | length 50
  Top Layer w40: Q1.3@1768,730 Q2.3@1818,730
NetQ5_B: Q5.B R34.1 R37.1 | length 204.6
  Top Layer w8: R34.1@1870,1314 1886,1330 R37.1@1886,1509 R37.1@1886,1512
NetQ8_B: Q8.B R54.1 R55.1 | length 90.7
  Bottom Layer w20: R54.1@91,2692 135.21,2692 Q8.B@135.21,2738.49
NetR10_2: R10.2 W1.3 | length 201.9
  Top Layer w10: v1(923,543) W1.3@948,543 ; v1(1048,489) 1069,489 R10.2@1075,483
  PWR w10: v1(923,543) 994,543 v1(1048,489)
NetR11_2: R11.2 W3.3 | length 54
  Top Layer w8: W3.3@1024,644 R11.2@1078,644
NetR12_1: R12.1 U5.7 | length 142.2
  Top Layer w8: R12.1@120.24,605.12 168.88,605.12 199.23,574.77 U5.7@249.87,574.77
NetR14_1: R14.1 U5.6 | length 148.3
  Top Layer w8: R14.1@120.24,645.48 156.52,645.48 201.64,600.36 U5.6@249.87,600.36
NetR17_2: R17.2 W2.4 | length 53.2
  Top Layer w8: R17.2@1859.12,637.67 R17.2@1859.44,638
  Top Layer w10: R17.2@1859.12,637.67 W2.4@1859.12,590.44 W2.4@1859.44,590.76 ; R17.2@1859.44,638 R17.2@1859.44,643
NetR18_1: R18.1 U5.5 | length 154.4
  Top Layer w8: R18.1@120.24,685.83 147.26,685.83 207.14,625.95 U5.5@249.87,625.95
NetR23_1: R23.1 U5.4 | length 160.5
  Top Layer w8: R23.1@120.24,726.19 147.26,726.19 221.91,651.54 U5.4@249.87,651.54